# Altium PCB jtag-isolator.PcbDoc
Units mm, origin at the board's own origin, x right, y up, seen from the top; angles counter-clockwise.
Board outline 100 x 50 mm, 2 copper layers (Top Layer, Bottom Layer); 39 components, 24 nets, 239 pads, 65 vias.
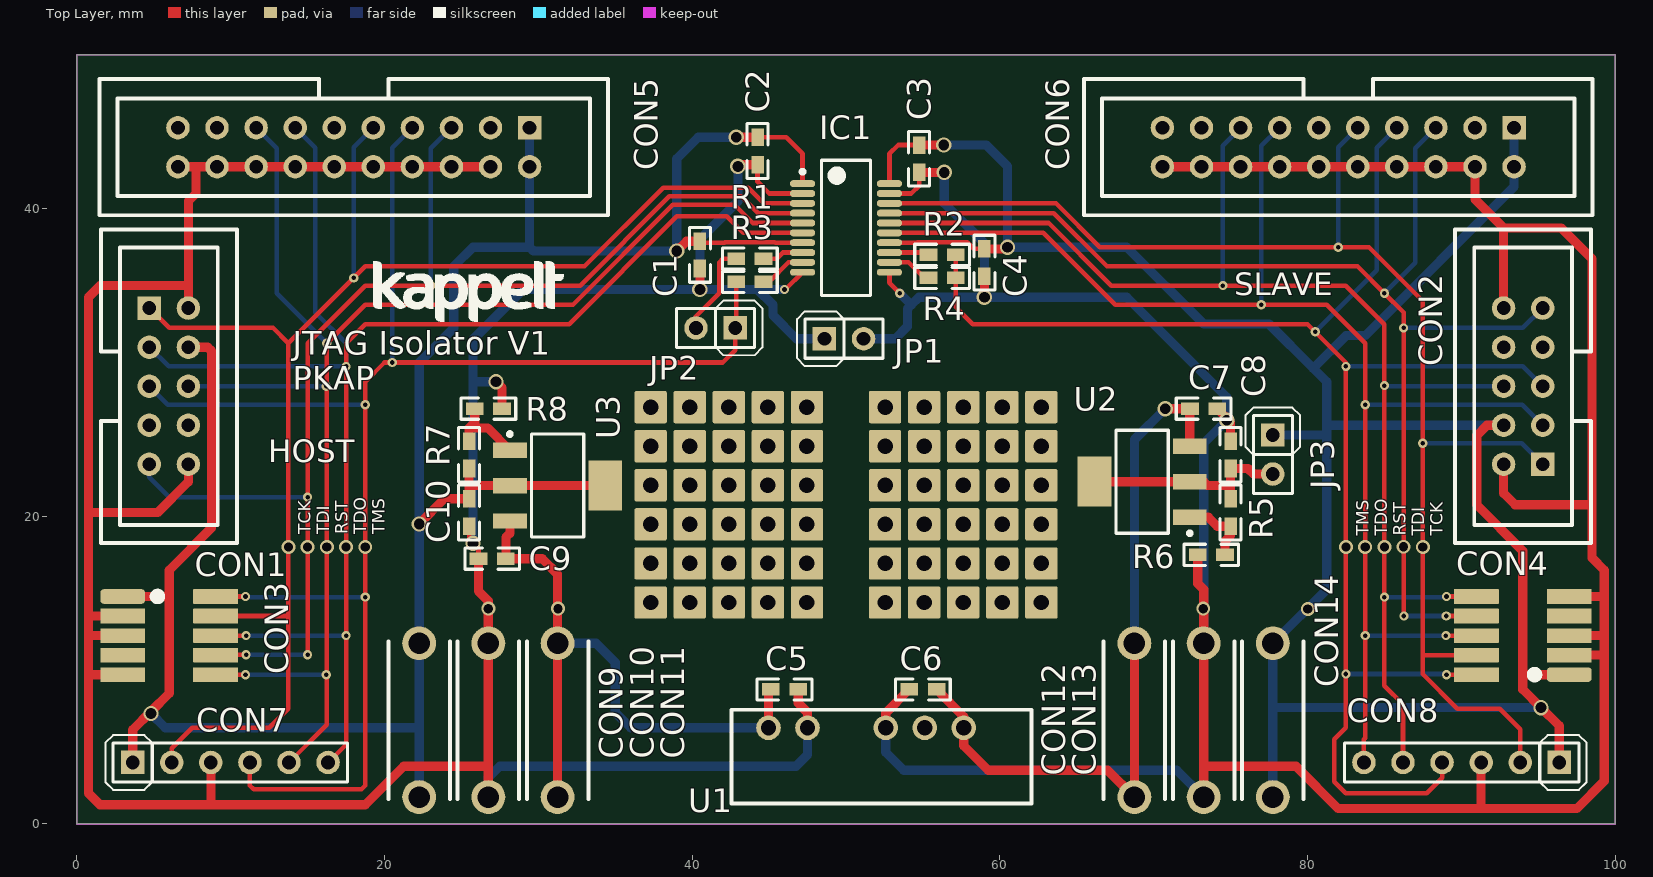
[diagram p0: Top Layer view]
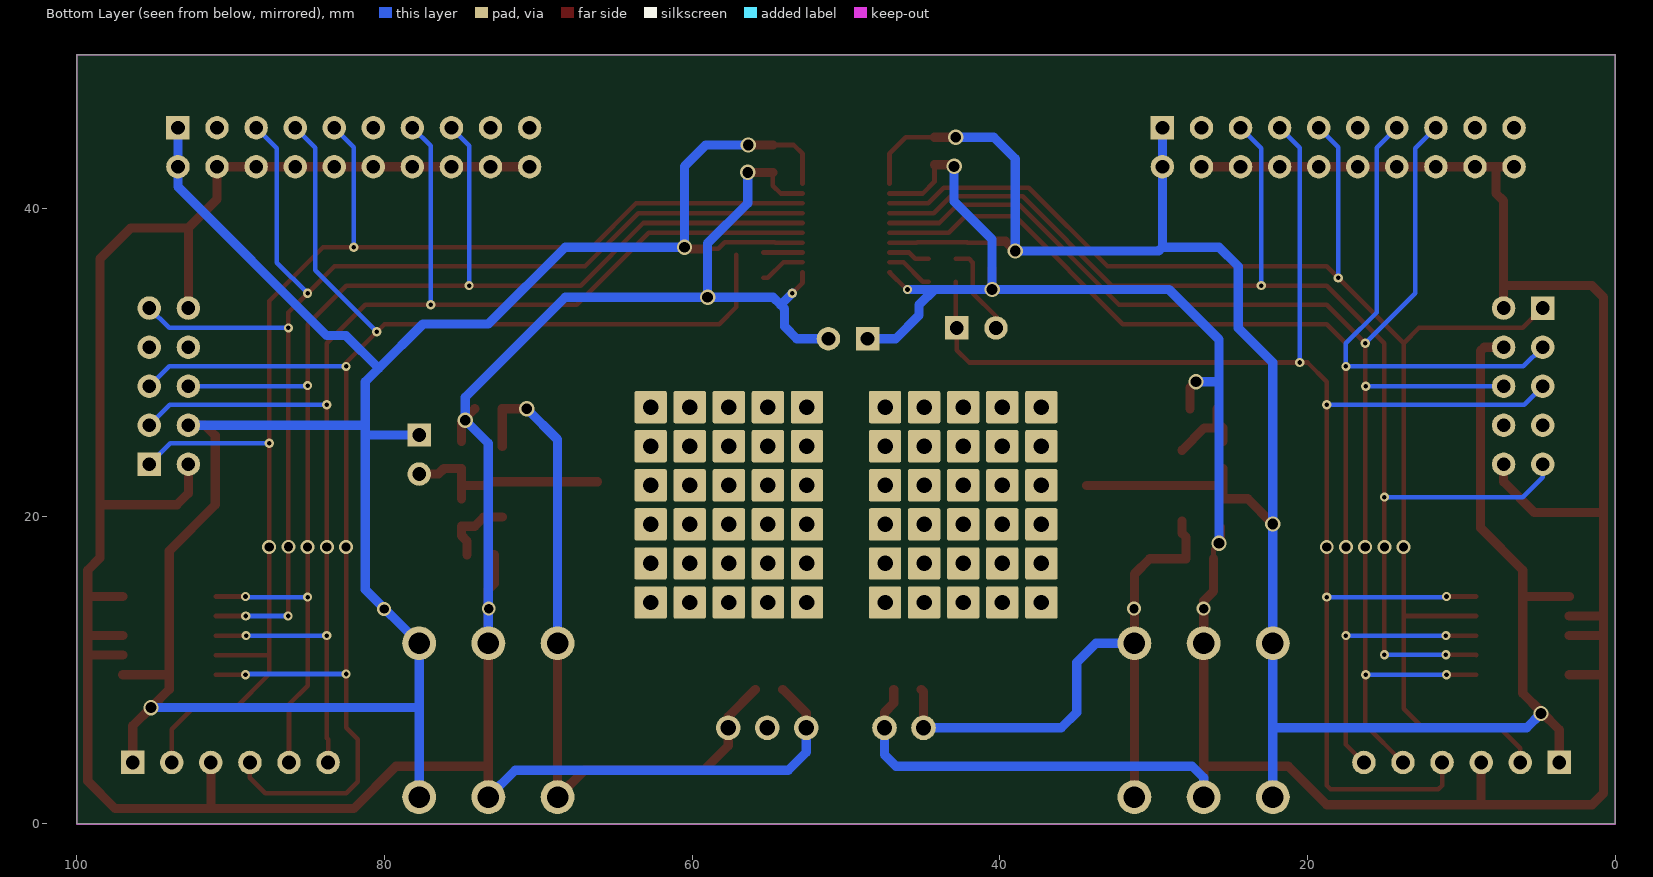
[diagram p1: Bottom Layer view, seen from below]

## Layer stack, top to bottom
Top Solder: solder mask 0.0102, Solder Resist, Dk 3.5
Top Layer: signal copper 0.0356
Dielectric 1: dielectric 0.32, FR-4, Dk 4.8
Bottom Layer: signal copper 0.0356
Bottom Solder: solder mask 0.0102, Solder Resist, Dk 3.5

## Board outline
0,0 100,0 100,50 0,50

## Design rules (kind name [scope] priority, off if disabled: settings)
BoardOutlineClearance [All] p1: gap=0.4
Clearance [All] p1: gap=0.254
MinimumAnnularRing [All] p1: minimumring=0.15
PolygonConnect [All] p1: connectstyle=Relief reliefconductorwidth=0.254 reliefentries=4 polygonreliefangle="90 Angle" airgapwidth=0.254
RoutingVias [All] p1: holewidth=0.7 width=1 viastyle="Through Hole" minholewidth=0.3 minwidth=0.6 maxholewidth=4 maxwidth=5
SolderMaskExpansion [All] p1: expansion=0.102
Width [All] p1: maxlimit=5 minlimit=0.254 preferedwidth=0.3
30 further rules are at their usual default settings.

## Components (designator, comment, footprint, x,y, rotation, side; value= is the part's Value field where it differs from the comment)
C1 "10n" 0603_N 40.5,37 r90 top
C2 "10n" 0603_N 44.25,43.75 r90 top
C3 "10n" 0603_N 54.75,43.25 r90 top
C4 "10n" 0603_N 59,36.5 r90 top
C5 "2.2u" 0603_N 46,8.75 r180 top
C6 "2.2u" 0603_N 55,8.75 r0 top
C7 "100n" 0603_N 73.25,27 r180 top
C8 "1u" 0603_N 75,24 r270 top
C9 "100n" 0603_N 27,17.25 r0 top
C10 "1u" 0603_N 25.5,20.25 r90 top
CON1 "Atmel JTAG" Atmel-JTAG 5.98,28.46 r0 top
CON2 "Atmel JTAG" Atmel-JTAG 94.02,28.46 r180 top
CON3 "Cortex Debug" cortex-dbg 6,12.25 r0 top
CON4 "Cortex Debug" cortex-dbg 94,12.25 r180 top
CON5 "Cortex Legacy" Cortex-Legacy 18,44 r270 top
CON6 "Cortex Legacy" Cortex-Legacy 82,44 r270 top
CON7 "ST-Disco" ST-Disco 3.63,4 r90 top
CON8 "ST-Disco" ST-Disco 96.37,4 r270 top
CON9 "2MM red" MPB1-Red 22.25,6.75 r90 top
CON10 "2MM black" MPB1-Black 26.75,6.75 r90 top
CON11 "2MM red" MPB1-Red 31.25,6.75 r90 top
CON12 "2MM red" MPB1-Red 68.75,6.75 r90 top
CON13 "2MM black" MPB1-Black 73.25,6.75 r90 top
CON14 "2MM red" MPB1-Red 77.75,6.75 r90 top
IC1 "ADuM7462 Isolator" ADUM7462-QSOP20 50,38.75 r0 top
JP1 "1x2" Header_254_1x2_male 48.6,31.55 r90 top
JP2 "1x2" Header_254_1x2_male 42.79,32.25 r270 top
JP3 "1x2" Header_254_1x2_male 77.75,25.29 r0 top
R1 "1k" 0603_N 43.75,36.75 r180 top
R2 "1k" 0603_N 56.25,37 r180 top
R3 "1k" 0603_N 43.75,35.25 r180 top
R4 "1k" 0603_N 56.25,35.5 r180 top
R5 "240R" 0603_N 75,20.25 r270 top
R6 "720R" 0603_N 73.75,17.5 r180 top
R7 "240R" 0603_N 25.5,24 r90 top
R8 "720R" 0603_N 26.75,27 r0 top
U1 "DC/DC 12V/12V" TMA-1212S 44.96,6.25 r0 top
U2 "LM317 Vreg" LM317-SOT223 69.25,22.25 r180 top
U3 "LM317 Vreg" LM317-SOT223 31.25,22 r0 top

## Footprints (in the part's own frame and the unit in brackets; to place one, negate y for a bottom-side part, rotate by r counter-clockwise, add the part's x,y. Pads: shape width x height; smd on the part's side, far side on the other; paste and mask are expansions set on the pad)
0603_N [mil] "0603 normal hand soldering size"
  rect 45x32 smd: 1(-35,0) 2(35,0)
  silkscreen extent -70,-27 70,27, body extent -67,-24 67,24, height 22
ADUM7462-QSOP20 [mm] "SOP, 20-Leads, Body 8,66x3,91mm, Pitch 0,64mm, IPC Low Density"
  oval 1.65x0.45 smd: 1(-2.825,2.88) 2(-2.825,2.24) 3(-2.825,1.6) 4(-2.825,0.96) 5(-2.825,0.32) 6(-2.825,-0.32) 7(-2.825,-0.96) 8(-2.825,-1.6) 9(-2.825,-2.24) 10(-2.825,-2.88) 11(2.825,-2.88) 12(2.825,-2.24) 13(2.825,-1.6) 14(2.825,-0.96) 15(2.825,-0.32) 16(2.825,0.32) 17(2.825,0.96) 18(2.825,1.6) 19(2.825,2.24) 20(2.825,2.88)
  silkscreen extent -2.95,-4.4 1.6,4.4, body extent -3,-4.4 3,4.4, height 1.9
Atmel-JTAG [mil]
  rect 60x60 hole 35: 1(-50,200)
  round 60 hole 35: 2(50,200) 3(-50,100) 4(50,100) 5(-50,0) 6(50,0) 7(-50,-100) 8(50,-100) 9(-50,-200) 10(50,-200)
  silkscreen extent -174,-401 174,401, body extent -174,-401 187,401, height 351
cortex-dbg [mm]
  rrect50% 2.92x0.95 smd: 1(-3.02,2.54)
  rrect5% 2.92x0.95 smd: 2(3.02,2.54) 3(-3.02,1.27) 4(3.02,1.27) 5(-3.02,0) 6(3.02,0) 7(-3.02,-1.27) 8(3.02,-1.27) 9(-3.02,-2.54) 10(3.02,-2.54)
  silkscreen extent -1.02,2.29 -0.51,2.79, body extent -2.92,-3.18 2.92,3.17, height 6.16
Cortex-Legacy [mil]
  rect 60x60 hole 35: 1(-50,450)
  round 60 hole 35: 2(50,450) 3(-50,350) 4(50,350) 5(-50,250) 6(50,250) 7(-50,150) 8(50,150) 9(-50,50) 10(50,50) 11(-50,-50) 12(50,-50) 13(-50,-150) 14(50,-150) 15(-50,-250) 16(50,-250) 17(-50,-350) 18(50,-350) 19(-50,-450) 20(50,-450)
  silkscreen extent -174,-651 174,651, body extent -171,-655 191,647, height 351
Header_254_1x2_male [mil]
  rect 60x60 hole 35: 1(0,0)
  round 60 hole 35: 2(0,-100)
  silkscreen extent -70,-150 70,70, body extent -49,-150 50,49, height 402
LM317-SOT223 [mm] "SOT223, 4-Leads, Body 6,50x7,00mm (avg), Pitch 2,30mm, IPC Low Density"
  rect 2.2x1 smd: 1(-3.1,2.3) 2(-3.1,0) 3(-3.1,-2.3)
  rect 2.2x3.25 smd: 2(3.1,0)
  silkscreen extent -3.22,-3.35 1.7,3.47, body extent -3.5,-3.35 3.5,3.35, height 1.8
MPB1-Black [mm]
  round 2.2 hole 1.4: 1(-5,0) 1(5,0)
  silkscreen extent -5.13,-2 5.13,2, body extent -5.13,-2 5.13,2, height 5.8
MPB1-Red [mm]
  round 2.2 hole 1.4: 1(-5,0) 1(5,0)
  silkscreen extent -5.13,-2 5.13,2, body extent -5.13,-2 5.13,2, height 5.8
ST-Disco [mil]
  rect 60x60 hole 35: 1(0,0)
  round 60 hole 35: 2(0,-100) 3(0,-200) 4(0,-300) 5(0,-400) 6(0,-500)
  silkscreen extent -70,-550 70,70, body extent -50,-550 49,49, height 402
TMA-1212S [mm]
  round 1.6 hole 1: 1(0,0) 2(2.54,0) 3(7.62,0) 4(10.16,0) 5(12.7,0)
  silkscreen extent -2.4,-4.92 17.1,1.17, body extent -2.4,-4.92 17.1,1.18, height 10.2

## Part data
C1 C2 C3 C4: library part 10n_50V_0603, "10n 50V 0603"
C5 C6: library part 2u2_25V_0603, "2u2 25V 0603"
C7 C9: library part 100n_50V_0603, "100n 50V 0603"
C8 C10: library part 1u_50V_0603, "1u 50V 0603"
CON1 CON2: library part Atmel-JTAG, "Atmel JTAG Connector"
CON3 CON4: library part Cortex-DBG
CON5 CON6: library part Cortex-Legacy
CON7 CON8: library part ST-Disco-SWD, "STM Discovery Board JTAG Connector"
CON9 CON11 CON12 CON14: library part 2MM-Red, "2MM test connector"
CON10 CON13: library part 2MM-Black, "2MM test connector"
IC1: library part ADuM7642, "1 kV RMS Six-Channel Digital Isolators"
JP1 JP2 JP3: library part Header_1x02_male, "Male Connector 1x2"
R1 R2 R3 R4: library part 1k_100mW_0603, "1k 100mW 0603"
R5 R7: library part 220R_100mW_0603, "240R 100mW 0603"
R6 R8: library part 680R_100mW_0603, "720R 100mW 0603"
U1: library part TMA-1212S, "Isolierter DC/DC-Wandler f. PCB-Montage, Fest, 1 Ausgang, 10.8 V, 13.2 V, 1 W, 12 V"
U2 U3: library part LM317DCY, "Linear Voltage Regulator, Adjustable, 40V primary input, 1.25V to 37V/1.5A/1 Output, SOT-223-4"

## Free pads (board coordinates)
  rrect10% 2.1x2.1 hole 1: 0(37.3,14.4) 0(37.3,16.94) 0(37.3,19.48) 0(37.3,22.02) 0(37.3,24.56) 0(37.3,27.1) 0(39.84,14.4) 0(39.84,16.94) 0(39.84,19.48) 0(39.84,22.02) 0(39.84,24.56) 0(39.84,27.1) 0(42.38,14.4) 0(42.38,16.94) 0(42.38,19.48) 0(42.38,22.02) 0(42.38,24.56) 0(42.38,27.1) 0(44.92,14.4) 0(44.92,16.94) 0(44.92,19.48) 0(44.92,22.02) 0(44.92,24.56) 0(44.92,27.1) 0(47.46,14.4) 0(47.46,16.94) 0(47.46,19.48) 0(47.46,22.02) 0(47.46,24.56) 0(47.46,27.1) 0(52.54,14.4) 0(52.54,16.94) 0(52.54,19.48) 0(52.54,22.02) 0(52.54,24.56) 0(52.54,27.1) 0(55.08,14.4) 0(55.08,16.94) 0(55.08,19.48) 0(55.08,22.02) 0(55.08,24.56) 0(55.08,27.1) 0(57.62,14.4) 0(57.62,16.94) 0(57.62,19.48) 0(57.62,22.02) 0(57.62,24.56) 0(57.62,27.1) 0(60.16,14.4) 0(60.16,16.94) 0(60.16,19.48) 0(60.16,22.02) 0(60.16,24.56) 0(60.16,27.1) 0(62.7,14.4) 0(62.7,16.94) 0(62.7,19.48) 0(62.7,22.02) 0(62.7,24.56) 0(62.7,27.1)

## Via types
v1: diameter 0.6, hole 0.3, Top Layer to Bottom Layer, tented both sides, 36 vias
v2: diameter 1, hole 0.7, Top Layer to Bottom Layer, tented both sides, 15 vias
v3: diameter 0.9, hole 0.6, Top Layer to Bottom Layer, 14 vias

## Nets (pads, with @x,y where several pads share a name; then routed paths per layer and width w, separated by ;. In a path a pad name is that pad's centre, name@x,y a point inside that pad or via, vN(x,y) a via of type N, cw(c..) or ccw(c..) an arc to the next point about the centre after c; other vN are vias at no path point)
HST_12V: C5.2 C9.2 CON11.1 U1.1 U3.3 | length 41.3
  Top Layer w0.6: U3.3 28.15,18.9 27.889,18.639 C9.2 30.25,17.25 31.25,16.25 31.25,11.75 CON11.1@31.25,1.75 ; U1.1 44.96,8.599 C5.2
  Bottom Layer w0.6: CON11.1@31.25,11.75 33.75,11.75 35,10.5 35,7.25 36,6.25 U1.1
  other v3: 31.275,14
HST_GND: C1.1 C2.1 C5.1 C9.1 C10.1 CON1.2 CON1.10 CON3.3 CON3.5 CON3.9 CON5.4 CON5.6 CON5.8 CON5.10 CON5.12 CON5.14 CON5.16 CON5.18 CON5.20 CON7.3 CON10.1 IC1.2 IC1.10 JP1.1 R8.2 U1.2 | length 221.4
  Top Layer w0.3: C10.1 25.5,18.5 v2(25.75,18.25) 26.111,17.889 C9.1 ; C2.1 44.25,41.75 45.01,40.99 IC1.2 ; v1(46,34.75) 46.055,34.75 IC1.10 IC1.10@47.12,35.87
  Top Layer w0.6: CON3.9 0.96,9.71 0.75,9.5 ; CON3.5 0.75,12.25 ; CON3.3 0.77,13.52 0.75,13.5 ; CON5.20 7.75,42.73 ; CON1.10 7.25,22.25 5.25,20.25 0.75,20.25 ; CON1.2 7.25,35 ; CON7.3 8.71,1.29 8.75,1.25 ; C9.1 26.111,15.139 26.75,14.5 26.75,11.75 CON10.1@26.75,1.75 ; 26.5,3.75 21.25,3.75 18.75,1.25 8.75,1.25 ; CON5.4 CON5.6 CON5.8 CON5.10 CON5.12 CON5.14 CON5.16 CON5.18 7.75,42.73 ; v2(27.25,28.75) 27.639,28.361 R8.2 ; v2(40.5,34.75) C1.1 ; v2(42.972,42.75) 42.861,42.861 C2.1 ; C5.1 46.889,7.861 47.5,7.25 U1.2 ; 0.75,9.5 0.75,2 1.5,1.25 8.75,1.25 ; 0.75,9.5 0.75,12.25 ; 0.75,12.25 0.75,13.5 ; 0.75,13.5 0.75,20.25 ; 0.75,20.25 0.75,34.25 1.5,35 7.25,35 ; 7.25,35 7.25,40.5 7.75,41 7.75,42.73
  Bottom Layer w0.6: v2(25.75,18.25) 25.75,28.75 ; CON10.1@26.75,1.75 26.75,3 27.5,3.75 46.75,3.75 47.5,4.5 U1.2 ; v2(27.25,28.75) 25.75,28.75 ; v2(42.972,42.75) 42.972,40.472 40.5,38 v2(40.5,34.75) ; v1(46,34.75) 44.25,34.75 ; JP1.1 46.775,31.55 45.25,33.075 45.25,33.75 44.25,34.75 ; 25.75,28.75 25.75,31.5 29,34.75 v2(40.5,34.75) ; v2(40.5,34.75) 44.25,34.75
  other v3: 26.75,14
HST_RST: CON1.6 CON3.10 CON5.15 CON7.5 IC1.5 | length 95.6
  Top Layer w0.3: CON3.10 v1(10.96,9.71) ; CON7.5 16.25,6.46 v1@16.25,9.75 ; v1(16.21,9.71) v1@16.25,9.75 ; v1(16.21,28.46) v1@16.25,28.5 ; IC1.5 43.93,39.07 42.75,40.25 38.75,40.25 32.25,33.75 18.75,33.75 v1(16.25,31.25) v1@16.25,28.5 ; v1@16.25,9.75 v3(16.25,18) v1@16.25,28.5
  Bottom Layer w0.3: CON1.6 v1(16.21,28.46) ; v1(10.96,9.71) v1(16.21,9.71) ; CON5.15 13,43.92 13,34.5 v1(16.25,31.25)
HST_TCK: CON1.1 CON3.4 CON5.9 CON7.2 IC1.3 | length 96.4
  Top Layer w0.3: CON1.1 6,32.25 12.75,32.25 13.75,31.25 ; CON7.2 6.17,4.92 7.5,6.25 12.5,6.25 13.75,7.5 13.75,13.5 ; CON3.4 13.73,13.52 13.75,13.5 ; IC1.3 44.65,40.35 43.642,41.358 38.108,41.358 33,36.25 18.75,36.25 v1(18,35.5) 13.75,31.25 ; 13.75,13.5 v3(13.75,18) 13.75,31.25
  Bottom Layer w0.3: v1(18,35.5) 18,44 CON5.9
HST_TDI: CON1.9 CON3.8 CON5.5 IC1.4 | length 85.3
  Top Layer w0.3: CON3.8 9.04,11 v1(11,11) ; v1(15,11) v3(15,18) v1(15,21.25) 15,31.25 18.75,35 v1(23,35) 32.717,35 38.521,40.804 43.196,40.804 44.29,39.71 IC1.4
  Bottom Layer w0.3: CON1.9 4.71,22.54 6,21.25 v1(15,21.25) ; v1(11,11) v1(15,11) ; v1(23,35) 23,43.92 CON5.5
HST_TDO: CON1.3 CON3.6 CON5.13 CON7.6 IC1.6 | length 99.9
  Top Layer w0.3: CON3.6 v1(11,12.25) ; CON7.6 17.5,5.17 v1(17.5,12.25) v3(17.5,18) v1(17.5,29.75) 17.5,31.25 18.75,32.5 32,32.5 39,39.5 42.25,39.5 43.32,38.43 IC1.6
  Bottom Layer w0.3: CON1.3 5.96,29.75 v1(17.5,29.75) 17.5,31.25 15.5,33.25 15.5,43.96 CON5.13 ; v1(11,12.25) v1(17.5,12.25)
HST_TMS: CON1.5 CON3.2 CON5.7 CON7.4 JP2.1 R3.2 | length 104.8
  Top Layer w0.3: CON3.2 v1(10.96,14.79) ; CON7.4 11.25,2.5 11.5,2.25 18.5,2.25 18.75,2.5 v1(18.75,14.75) v3(18.75,18) v1(18.75,27.25) 18.75,28.75 20,30 v1(20.5,30) 42,30 42.79,30.79 JP2.1 ; JP2.1@42.861,32.389 R3.2
  Bottom Layer w0.3: CON1.5 5.92,27.25 v1(18.75,27.25) ; v1(10.96,14.79) 11,14.75 v1(18.75,14.75) ; v1(20.5,30) 20.5,43.96 CON5.7
HST_VCC: C1.2 C2.2 C10.2 CON1.4 CON3.1 CON5.1 CON5.2 CON7.1 CON9.1 IC1.1 IC1.7 R7.1 U3.2 | length 149.9
  Top Layer w0.3: C1.2 40.599,37.79 42.102,37.79 42.122,37.81 45.378,37.81 45.398,37.79 IC1.7 ; C2.2 46.111,44.639 47.175,43.575 IC1.1
  Top Layer w0.6: CON3.1 5.71,14.79 ; CON7.1 3.63,6.13 v2@4.815,7.315 ; v2(4.815,7.185) v2@4.815,7.315 ; CON1.4 8.5,31 8.75,30.75 8.75,19.25 6,16.5 6,8.5 v2@4.815,7.315 ; v2(22.25,19.5) 23.889,21.139 C10.2 25.5,22 ; R7.1 25.5,22 ; U3.2@34.35,22 28.15,22 25.5,22 ; v2(39,37.25) 39.639,37.889 C1.2 ; v2(42.861,44.639) C2.2
  Bottom Layer w0.6: v2(4.815,7.185) 5.75,6.25 22.25,6.25 ; CON9.1@22.25,1.75 22.25,6.25 ; CON5.1 CON5.2 29.43,37.5 ; v2(42.861,44.639) 40.389,44.639 39,43.25 v2(39,37.25) 29.68,37.25 29.43,37.5 ; 22.25,6.25 22.25,11.75 22.25,30 24.5,32.25 24.5,36.25 25.75,37.5 29.43,37.5
NetC8_2: C8.2 JP3.2 R5.1 U2.2 | length 13.8
  Top Layer w0.6: U2.2@66.15,22.25 72.35,22.25 73.25,22.25 73.5,22 75,22 ; R5.1 75,22 ; JP3.2 76.5,22.75 76.139,23.111 C8.2 75,22
NetIC1_8: IC1.8 R1.1 | length 2.7
  Top Layer w0.3: R1.1 45.5,36.75 45.9,37.15 IC1.8
NetIC1_9: IC1.9 R3.1 | length 3.1
  Top Layer w0.3: R3.1 45,35.25 46.26,36.51 IC1.9
NetIC1_12: IC1.12 R4.2 | length 3
  Top Layer w0.3: IC1.12 54.065,36.51 55.075,35.5 R4.2
NetIC1_13: IC1.13 R2.2 | length 2.5
  Top Layer w0.3: IC1.13 R2.2@55.361,37.15
NetJP2_2: JP2.2 R1.2 | length 6.1
  Top Layer w0.3: JP2.2 40.25,33 41.75,34.5 41.75,36.5 42,36.75 R1.2
NetR5_2: R5.2 R6.1 U2.1 | length 4.9
  Top Layer w0.6: U2.1 73.55,19.95 74.139,19.361 R5.2 75,18.75 74.639,18.389 R6.1
NetR7_2: R7.2 R8.1 U3.1 | length 5.5
  Top Layer w0.6: R7.2 25.5,25.75 ; R8.1 25.861,26.111 25.5,25.75 ; U3.1 26.7,25.75 25.5,25.75
SLV_12V: C6.2 C7.2 CON12.1 U1.5 U2.3 | length 47
  Top Layer w0.6: C6.2 57.66,6.979 U1.5 57.66,5.09 59.25,3.5 67,3.5 68.75,1.75 CON12.1@68.75,11.75 ; v2(70.75,27) C7.2 72.35,26.989 U2.3
  Bottom Layer w0.6: CON12.1@68.75,11.75 68.75,25 v2(70.75,27)
SLV_GND: C3.1 C4.1 C6.1 C7.1 C8.1 CON2.2 CON2.10 CON4.3 CON4.5 CON4.9 CON6.4 CON6.6 CON6.8 CON6.10 CON6.12 CON6.14 CON6.16 CON6.18 CON6.20 CON8.3 CON13.1 IC1.11 IC1.19 JP1.2 R6.2 U1.3 | length 224.5
  Top Layer w0.3: IC1.11 52.825,35.175 v1(53.5,34.5) ; IC1.19 54.24,40.99 54.75,41.5 C3.1
  Top Layer w0.6: U1.3 52.58,7.219 C6.1 ; C3.1 v2(56.389,42.361) ; v2(59,34.25) C4.1 ; CON6.20 CON6.18 CON6.16 CON6.14 CON6.12 CON6.10 CON6.8 CON6.6 CON6.4 90.89,40.61 92.75,38.75 ; R6.2 72.861,15.639 73.25,15.25 73.25,11.75 73.25,3.75 ; CON13.1@73.25,1.75 73.25,3.75 ; C7.1 75,26.139 C8.1 ; CON8.3 91.29,1 ; CON2.2 92.75,21.5 93.5,20.75 98.5,20.75 ; CON2.10 92.75,38.75 ; CON4.3 99.28,10.98 99.3,11 ; CON4.5 99.3,12.25 ; CON4.9 99.26,14.79 99.3,14.75 ; 73.25,3.75 79.25,3.75 82,1 91.29,1 ; 91.29,1 97.5,1 99.3,2.8 99.3,11 ; 92.75,38.75 96.5,38.75 98.5,36.75 98.5,20.75 ; 98.5,20.75 98.5,17.3 99.3,16.5 99.3,14.75 ; 99.3,11 99.3,12.25 ; 99.3,12.25 99.3,14.75
  Bottom Layer w0.6: JP1.2 53.2,31.55 54,32.35 54,33.5 54.25,33.75 ; U1.3 52.58,4.67 53.75,3.5 71.5,3.5 CON13.1@73.25,1.75 ; v1(53.5,34.5) 54.25,33.75 ; v2(56.389,42.361) 56.389,40.361 59,37.75 v2(59,34.25) ; CON13.1@73.25,11.75 73.25,24.75 v2(74.75,26.25) 74.75,27.75 68.25,34.25 v2(59,34.25) ; 54.25,33.75 54.75,34.25 v2(59,34.25)
  other v3: 73.225,14
SLV_RST: CON2.6 CON4.10 CON6.15 CON8.5 IC1.16 | length 88.4
  Top Layer w0.3: IC1.16 63.18,39.07 67.25,35 v1(74.5,35) 82.5,35 85,32.5 v1(85,28.5) v3(85,18) v1(85,14.75) 85,9 86.21,7.79 CON8.5 ; v1(89.04,14.79) CON4.10
  Bottom Layer w0.3: v1(74.5,35) 74.484,35.016 74.484,44.104 CON6.15 ; v1(85,14.75) 89,14.75 v1(89.04,14.79) ; v1(85,28.5) 85.04,28.46 CON2.6
SLV_TCK: CON2.1 CON4.4 CON6.9 CON8.2 IC1.18 | length 91.7
  Top Layer w0.3: IC1.18 63.65,40.35 66.5,37.5 v1(82,37.5) 84,37.5 87.5,34 v1(87.5,24.75) v3(87.5,18) 87.5,11 ; CON4.4 87.52,10.98 87.5,11 ; CON8.2 93.83,6.17 92.5,7.5 89.75,7.5 87.5,9.75 87.5,11
  Bottom Layer w0.3: v1(82,37.5) 82,44 CON6.9 ; v1(87.5,24.75) 93.92,24.75 CON2.1
SLV_TDI: CON2.9 CON4.8 CON6.5 IC1.17 | length 82.3
  Top Layer w0.3: IC1.17 63.507,39.71 66.967,36.25 83.25,36.25 v1(85,34.5) 86.25,33.25 v1(86.25,32.25) v3(86.25,18.025) 86.25,13.5 v1(86.27,13.52) ; v1(89.02,13.52) CON4.8
  Bottom Layer w0.3: v1(85,34.5) 87,36.5 87,43.92 CON6.5 ; v1(86.25,32.25) 94,32.25 CON2.9 ; v1(86.27,13.52) v1(89.02,13.52)
SLV_TDO: CON2.3 CON4.6 CON6.13 CON8.6 IC1.15 | length 92.5
  Top Layer w0.3: IC1.15 62.82,38.43 67.5,33.75 v1(77,33.75) 81.25,33.75 83.75,31.25 v1(83.75,27.25) v3(83.75,18) v1(83.75,12.25) 83.75,5.58 83.67,5.5 CON8.6 ; v1(89,12.25) CON4.6
  Bottom Layer w0.3: v1(77,33.75) 77,44.08 CON6.13 ; v1(83.75,12.25) v1(89,12.25) ; v1(83.75,27.25) 93.96,27.25 CON2.3
SLV_TMS: CON2.5 CON4.2 CON6.7 CON8.4 R2.1 R4.1 | length 103.8
  Top Layer w0.3: R2.1 R4.1 57.139,33.611 58.25,32.5 80,32.5 82.5,30 v1(82.5,29.75) v3(82.5,18) v1(82.5,9.75) 82.5,6.25 81.75,5.5 81.75,2.75 82.5,2 87.75,2 88.75,3 CON8.4 ; v1(89.04,9.71) CON4.2
  Bottom Layer w0.3: v1(80.5,32) 84.5,36 84.5,43.96 CON6.7 ; v1(82.5,9.75) 89,9.75 v1(89.04,9.71) ; v1(82.5,29.75) 94,29.75 CON2.5
SLV_VCC: C3.2 C4.2 CON2.4 CON4.1 CON6.1 CON6.2 CON8.1 CON14.1 IC1.14 IC1.20 JP3.1 | length 159.2
  Top Layer w0.3: IC1.14 54.602,37.79 54.622,37.81 57.878,37.81 58.299,37.389 C4.2 ; IC1.20 52.825,43.575 53.389,44.139 C3.2
  Top Layer w0.6: C3.2 v2(56.361,44.139) ; C4.2 60.389,37.389 v2(60.5,37.5) ; CON2.4 91.67,25.92 91,25.25 91,20.75 94,17.75 94,9.75 ; CON8.1 96.37,6.38 v2(95.185,7.565) 94,8.75 94,9.75 ; CON4.1 94.04,9.71 94,9.75
  Bottom Layer w0.6: v2(56.361,44.139) 59.111,44.139 60.5,42.75 v2(60.5,37.5) 68.25,37.5 73.25,32.5 77.5,32.5 80.375,29.625 ; CON14.1@77.75,1.75 77.75,7.5 ; JP3.1 81.25,25.29 ; CON2.4 81.33,25.92 81.25,26 ; CON6.1 CON6.2 93.43,41.43 83.75,31.75 82.5,31.75 80.375,29.625 ; v2(95.185,7.565) 77.815,7.565 77.75,7.5 ; 77.75,7.5 77.75,11.75 81.25,15.25 81.25,25.29 ; 80.375,29.625 81.25,28.75 81.25,26 ; 81.25,25.29 81.25,26
  other v3: 80.025,13.975
pads on no net: CON1.7 CON1.8 CON2.7 CON2.8 CON3.7 CON4.7 CON5.3 CON5.11 CON5.17 CON5.19 CON6.3 CON6.11 CON6.17 CON6.19 U1.4

## Keep-outs
Keep-Out Layer:
  the board outline again, w0.1

## Silkscreen, mask and mechanical layers (free items; w line width, h text height)
Top Overlay:
  drawing of 1048 lines, arcs and shapes, not listed
  text "SLAVE" at 75.25,33.9 h2.5
  text "JTAG Isolator V1 / PKAP" at 14.025,28.225 h1.52
  text "HOST" at 12.45,23.025 h2.5
  text "TCK / TDI / RST / TDO / TMS" at 20,18.825 h0.8 r90
  text "TMS / TDO / RST / TDI / TCK" at 88.8,18.75 h0.8 r90